# Altium PCB BEE-DAL_EXP.PcbDoc (part 4 of 5)
Units mm, origin at the board's own origin, x right, y up, seen from the top; angles counter-clockwise.
Board outline 93 x 90 mm, 6 copper layers (L1 TOP, L2 GND, L3 SIGNAL, L4 PWR, L5 GND, L6 BOT), stack 1.516 mm thick; 548 components, 447 nets, 1827 pads, 1142 vias.
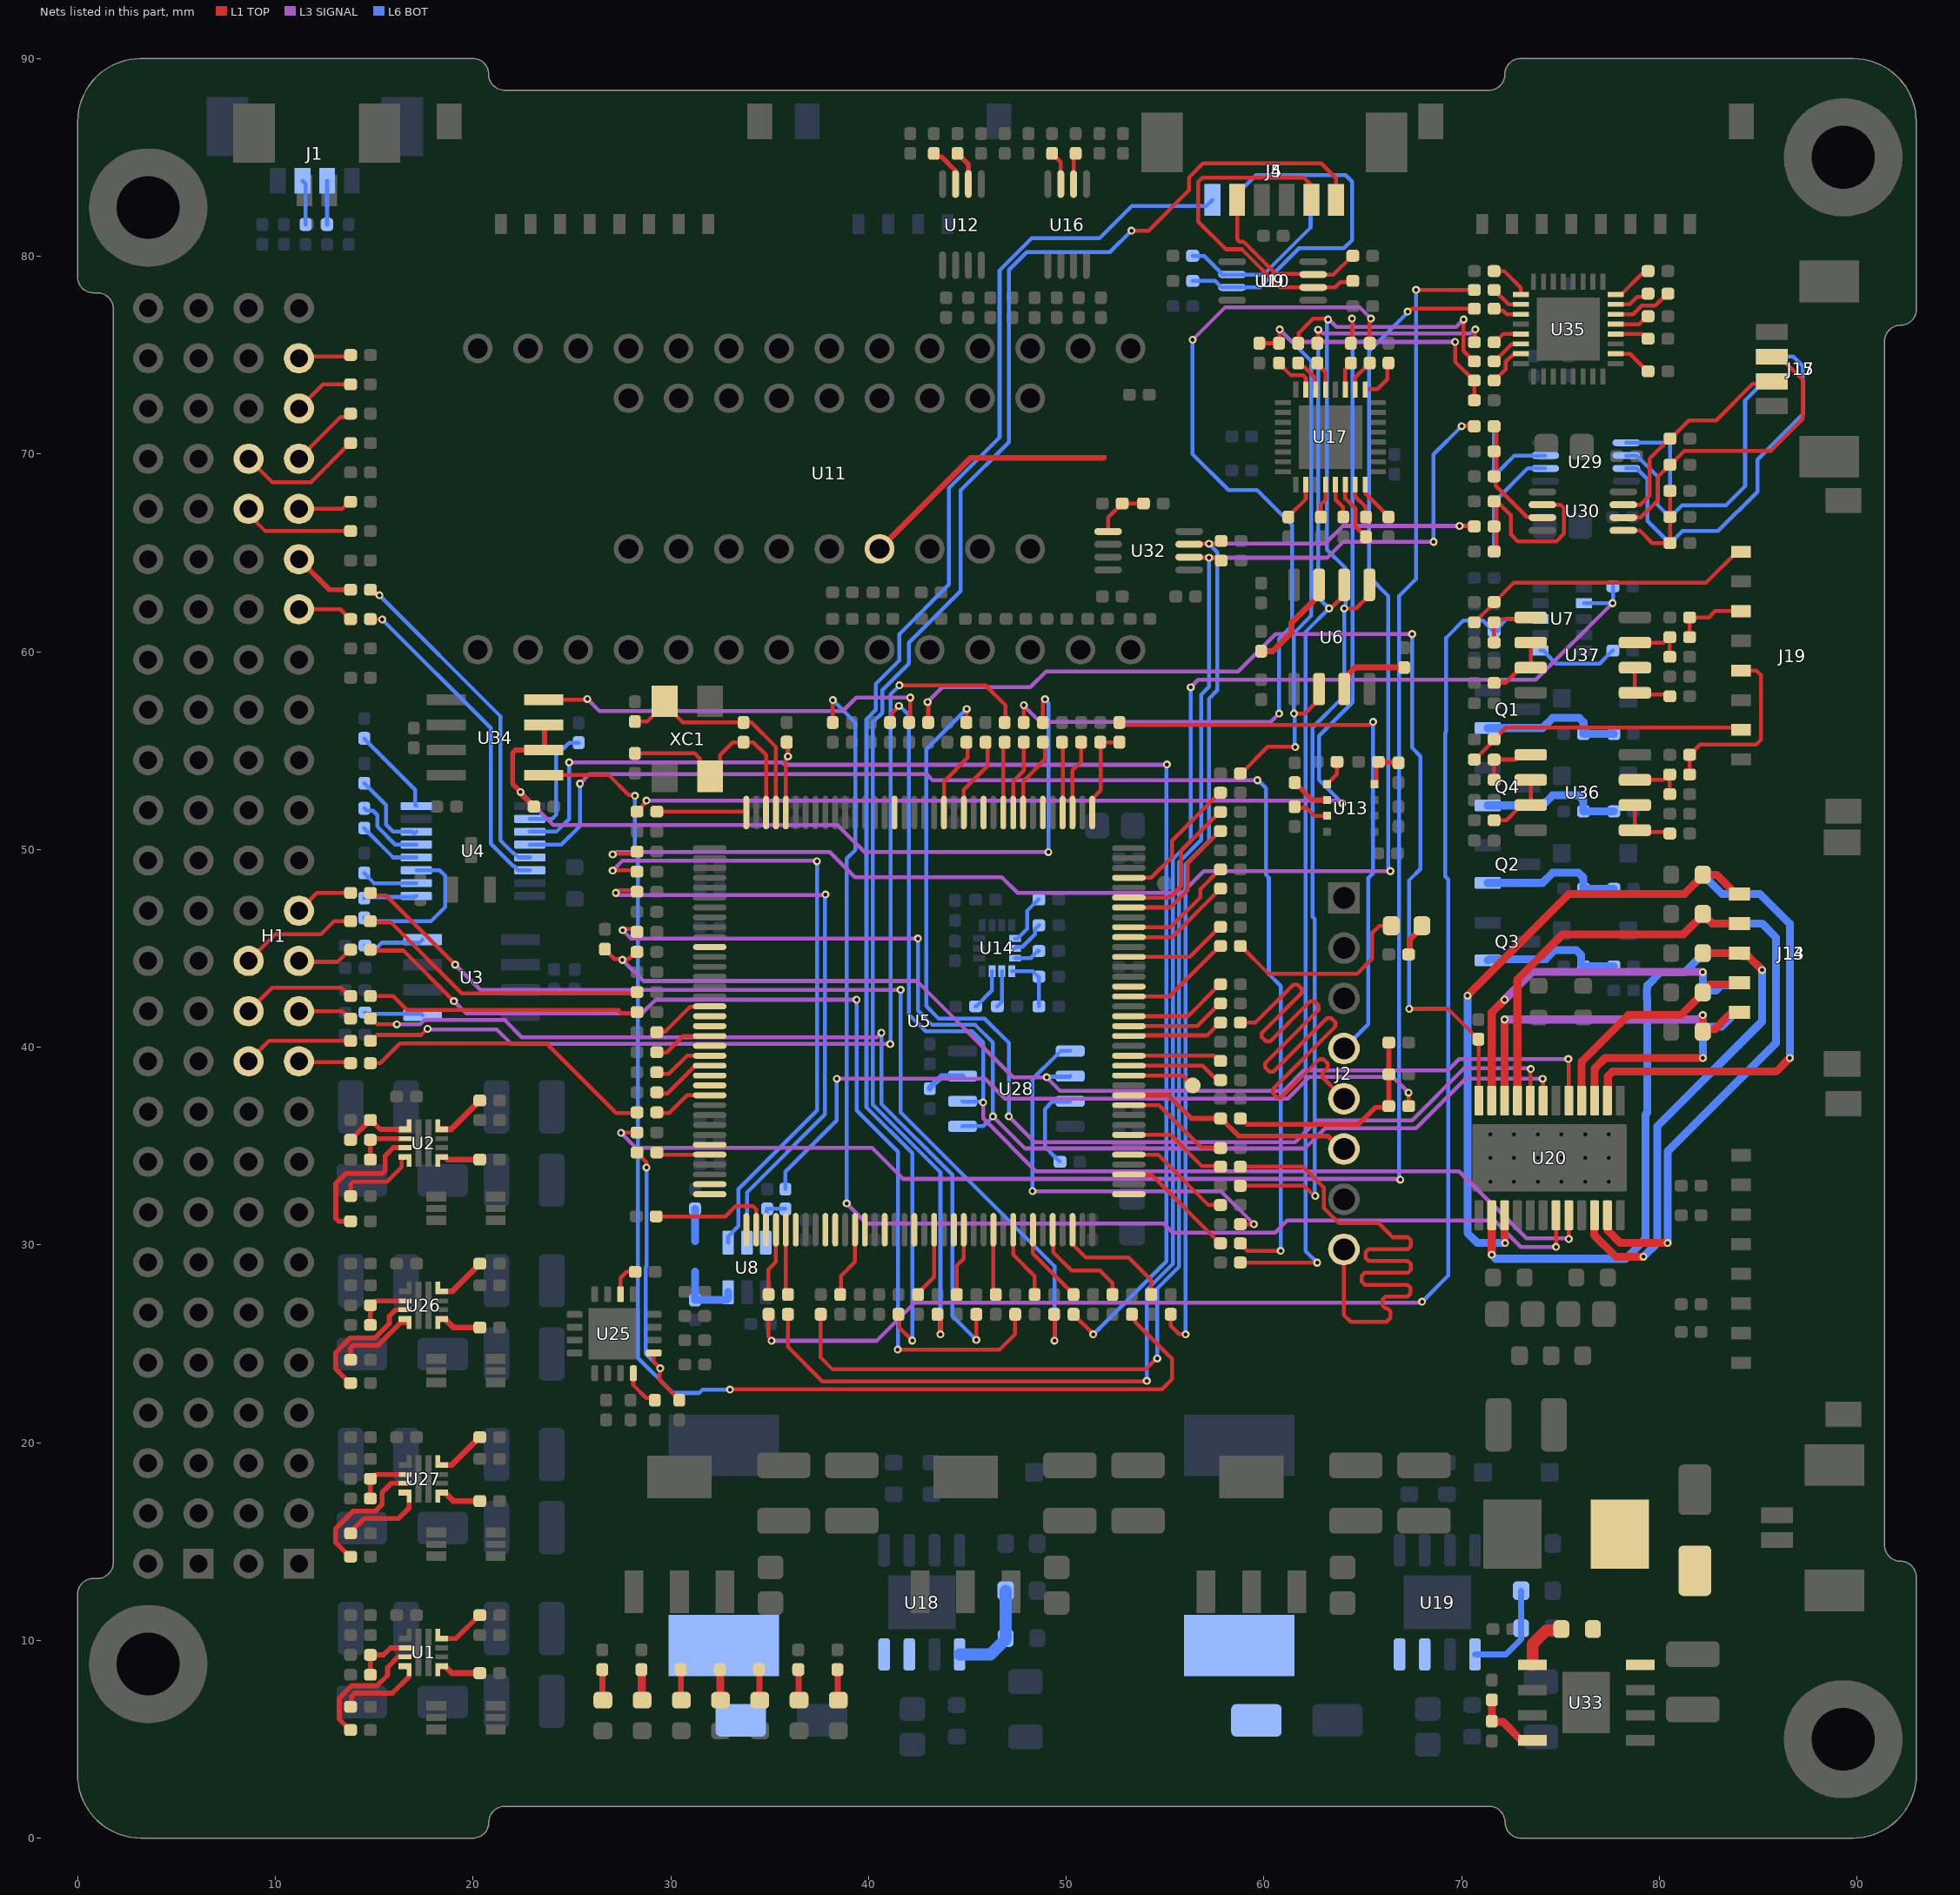
[diagram p8: the nets of this part, all layers, seen from the top]

## Via types
v1: diameter 0.4, hole 0.2, L1 TOP to L6 BOT, tented both sides, 1132 vias
v2: diameter 0.6, hole 0.3, L1 TOP to L6 BOT, tented both sides, 10 vias

## Nets (pads, with @x,y where several pads share a name; then routed paths per layer and width w, separated by ;. In a path a pad name is that pad's centre, name@x,y a point inside that pad or via, vN(x,y) a via of type N, cw(c..) or ccw(c..) an arc to the next point about the centre after c; other vN are vias at no path point) (continued)
MCU_nRESET: J2.6 R81.1 U5.83 | length 12
  L1 TOP w0.25: U5.83@53.172,37.564 55.167,37.564 56.338,36.394 57.833,36.394 58.727,35.5 63.245,35.5 63.895,34.85 J2.6@64.05,34.85
MCU_OSCIN: C25.2 R112.2 U5.141 XC1.3 | length 11.6
  L1 TOP w0.2: C25.2@28.19,56.465 28.81,56.465 29.529,57.184 29.851,57.184 30.615,56.42 34.084,56.42 35.322,55.182 U5.141@35.322,51.864
MCU_OSCOUT: C26.2 R112.1 U5.142 XC1.1 | length 11.6
  L1 TOP w0.2: C26.2@28.19,54.855 31.214,54.855 31.49,54.579 31.49,54.195 XC1.1@31.99,53.695 ; XC1.1@32.045,53.64 32.49,54.085 32.49,54.77 33.14,55.42 34.172,55.42 34.822,54.77 U5.142@34.822,51.864
MCU_PC104_I2C2_SCL: R74.1 R289.1 R316.1 R330.1 U32.3 | length 58.8
  L1 TOP w0.2: R74.1@55.291,26.49 55.291,25.917 55.711,25.496 56.019,25.496 v1(56.041,25.475) ; U32.3@56.223,65.432 56.251,65.46 v1(57.224,65.46) 57.701,65.46 R330.1@57.842,65.602 ; v1(69.9,66.359) 69.912,66.347 70.758,66.347 R316.1@70.77,66.335
  L3 SIGNAL w0.2: v1(57.224,65.46) 63.106,65.46 64.004,66.359 v1(69.9,66.359)
  L6 BOT w0.2: v1(56.041,25.475) 56.041,49.236 57.224,50.419 57.224,57.624 57.649,58.049 57.649,65.035 v1(57.224,65.46) ; v1(69.9,66.359) 69.912,66.347 70.759,66.347 R289.1@70.77,66.335
MCU_PC104_I2C2_SDA: R72.1 R302.1 R317.1 R329.1 U32.2 | length 82.6
  L1 TOP w0.2: R72.1@37.588,26.49 37.588,24.296 38.184,23.7 54.02,23.7 54.573,24.253 v1(54.607,24.253) ; U32.2@56.223,64.782 56.251,64.753 v1(57.224,64.753) 57.696,64.753 R329.1@57.842,64.607 ; v1(70,71.4) R317.1@70.77,71.4
  L3 SIGNAL w0.2: v1(57.224,64.753) 63.211,64.753 64.013,65.555 v1(68.584,65.555)
  L6 BOT w0.2: v1@54.607,24.254 54.607,27.793 55.716,28.901 55.716,49.37 56.825,50.48 56.825,57.824 57.224,58.223 v1(57.224,64.753) ; v1(68.584,65.555) 68.584,69.984 v1(70,71.4) R302.1@70.77,71.4
MCU_PC104_SPI0_CS1: R233.1 R326.1 | length 15.3
  L1 TOP w0.2: R233.1@14.805,39.186 14.81,39.192 15.313,39.192 16.304,40.183 23.722,40.183 27.24,36.664 R326.1@28.27,36.664
MCU_PC104_SPI0_CS2: R311.1 R325.2 | length 51.7
  L1 TOP w0.2: R311.1@14.805,40.318 14.847,40.318 15.147,40.618 17.371,40.618 17.678,40.925 v1(17.7,40.925) ; v1(41.57,58.3) 45.923,58.3 46.928,57.295 R325.2@46.928,56.556
  L3 SIGNAL w0.2: v1(17.7,40.925) 17.725,40.9 21.2,40.9 21.925,40.175 41.081,40.175 v1(41.1,40.156)
  L6 BOT w0.2: v1(41.1,40.156) 41.115,40.171 41.115,57.845 v1(41.57,58.3)
MCU_PC104_SPI0_IRQ1: R307.2 R309.2 | length 13.8
  L1 TOP w0.2: R307.2@14.891,42.583 15.95,42.583 16.658,41.875 27.343,41.875 27.504,41.714 R309.2@28.295,41.714
MCU_PC104_SPI0_IRQ2: R310.2 R312.2 | length 15
  L1 TOP w0.2: R312.2@14.805,46.37 14.861,46.314 15.836,46.314 19.425,42.725 R310.2@28.295,42.725
MCU_PC104_SPI0_MISO: R109.1 R236.1 | length 51.2
  L1 TOP w0.2: R236.1@14.805,47.806 14.938,47.674 15.594,47.674 v1(19.098,44.169) ; v1(49.41,25.153) R109.1@49.41,26.49
  L3 SIGNAL w0.2: v1(19.098,44.169) 20.367,42.9 v1(41.625,42.9)
  L6 BOT w0.2: v1(41.625,42.9) 41.625,36.7 49.41,28.915 v1(49.41,25.153)
MCU_PC104_SPI0_MOSI: R235.1 R323.1 | length 52.1
  L1 TOP w0.2: R235.1@14.805,44.933 14.853,44.885 16.473,44.885 v1(19.032,42.327) ; v1(41.481,24.704) 46.632,24.704 47.423,25.495 R323.1@47.423,26.49
  L3 SIGNAL w0.2: v1(19.032,42.327) 19.659,41.7 28.534,41.7 29.234,42.4 v1(39.4,42.4)
  L6 BOT w0.2: v1(39.4,42.4) 39.4,36.8 41.489,34.711 41.489,24.712 v1(41.481,24.704)
MCU_PC104_SPI0_SCK: R234.1 R324.2 | length 45.3
  L1 TOP w0.2: R234.1@14.805,41.45 14.847,41.45 15.147,41.15 v1(16.14,41.15) ; v1(45.456,25.196) R324.2@45.456,26.433
  L3 SIGNAL w0.2: v1(16.14,41.15) 17.324,41.15 17.549,41.375 21.592,41.375 22.467,40.5 40.422,40.5 v1(40.65,40.728)
  L6 BOT w0.2: v1(40.65,40.728) 40.65,37.131 44.244,33.537 44.244,26.408 v1(45.456,25.196)
MCU_PRAM_SPI1_nCS: R308.2 U28.1 | length 20.7
  L1 TOP w0.2: R308.2@58.808,31.048 v1(59.5,31.048)
  L3 SIGNAL w0.2: v1(48.3,32.718) 48.318,32.7 57.848,32.7 v1(59.5,31.048)
  L6 BOT w0.2: v1(48.3,32.718) 48.3,38.381 49.545,39.626 49.552,39.626 49.731,39.805 U28.1@50.204,39.805
MCU_RS232_RX_OBC_TX: R242.1 U4.13 | length 17.4
  L1 TOP w0.2: R242.1@14.805,63.133 14.857,63.133 15.095,62.895 15.225,62.895 v1(15.263,62.856)
  L6 BOT w0.2: v1(15.263,62.856) 21.377,56.743 21.377,50.46 22.022,49.814 22.071,49.814 22.291,49.594 U4.13@22.871,49.594
MCU_RS232_TX_OBC_RX: R241.1 U4.14 | length 16.8
  L1 TOP w0.2: R241.1@14.805,61.648 14.814,61.639 15.395,61.639 v1(15.404,61.63)
  L6 BOT w0.2: v1(15.404,61.63) 20.9,56.134 20.9,50.287 22.022,49.164 22.071,49.164 22.291,48.944 U4.14@22.871,48.944
MCU_RS485_R\E\_DE: R275.2 R313.2 U34.2 U34.3 | length 43
  L1 TOP w0.2: R313.2@48.824,56.513 48.824,57.453 48.93,57.559 v1(48.93,57.6)
  L1 TOP w0.25: R275.2@23.106,52.17 23.056,52.17 22.429,52.797 22.429,52.871 v1(22.4,52.9) 22.4,52.913 22,53.313 22,54.879 22.146,55.025 23.615,55.025 U34.3@23.615,56.295
  L3 SIGNAL w0.2: v1(22.4,52.9) 24.075,51.225 38.443,51.225 39.803,49.865 v1(49.1,49.865)
  L6 BOT w0.2: v1(48.93,57.6) 48.93,57.559 49.1,57.389 v1(49.1,49.865)
MCU_RTC_CLKOUT: R86.2 R117.1 U7.3 | length 74.8
  L1 TOP w0.2: R86.2@34.948,26.49 34.948,25.356 35.098,25.206 v1(35.098,25.151)
  L3 SIGNAL w0.2: v1(35.098,25.151) 40.42,25.151 42.343,27.075 67.809,27.075 67.82,27.087 67.962,27.087 v1(68,27.125)
  L6 BOT w0.2: v1(68,27.125) 69.325,28.45 69.325,48.483 69.175,48.633 69.175,55.89 69.225,55.94 69.225,60.707 70.085,61.567 71.093,61.567 71.618,61.042 R117.1@71.643,61.042 ; R117.1@71.826,61.042 71.851,61.067 71.851,61.225 72.28,61.653 U7.3@73.994,61.653
MCU_RTC_INT: R87.2 R118.1 U7.7 | length 81.9
  L1 TOP w0.2: R87.2@35.928,26.49 35.928,24.842 37.67,23.1 54.055,23.1 v1(54.08,23.125)
  L3 SIGNAL w0.2: v1(56.3,58.2) 56.675,58.575 73.755,58.575 v1(77.633,62.453)
  L6 BOT w0.2: v1(54.08,23.125) 54.08,27.726 55.391,29.036 55.391,49.505 56.3,50.414 v1(56.3,58.2) ; U7.7@76.194,62.453 v1(77.633,62.453) 77.658,62.478 R118.1@77.658,63.303
MCU_SENSOR1_nIRQ: J4.1 R64.1 | length 79.8
  L1 TOP w0.2: R64.1@43.44,26.49 43.64,26.29 v1(43.64,25.475) ; v1(53.3,81.292) 54.165,81.292 56.223,83.35 56.223,84 56.923,84.7 62.9,84.7 63.65,83.95 J4.1@63.65,82.85
  L6 BOT w0.2: v1(43.64,25.475) 43.64,33.681 40.225,37.096 40.225,56.439 40.7,56.914 40.7,58.047 42.05,59.397 42.05,60.45 44.665,63.065 44.665,68.165 47.1,70.6 47.1,79.301 48.004,80.205 52.214,80.205 v1(53.3,81.292)
MCU_SENSOR2_nIRQ: J5.1 R66.1 | length 71.7
  L1 TOP w0.2: R66.1@41.489,26.483 41.564,26.407 41.564,25.811 v1(42.216,25.16)
  L6 BOT w0.2: v1(42.216,25.16) 42.216,34.646 39.9,36.962 39.9,56.589 40.375,57.064 40.375,58.373 41.57,59.568 41.57,60.899 44.075,63.404 44.075,68.275 46.631,70.831 46.631,79.292 48.244,80.905 51.688,80.905 53.333,82.55 57.1,82.55 J5.1@57.4,82.85
MCU_SPI0_CMD_SOLE_A: R105.2 R171.1 | length 47.6
  L1 TOP w0.2: R105.2@47.857,56.449 v1(47.857,57.295) ; R171.1@65.354,75.6 65.354,76.644 65.38,76.67 65.38,76.812 v1(65.418,76.85)
  L3 SIGNAL w0.2: v1(47.857,57.295) 47.857,57.273 48.68,56.45 60.345,56.45 v1(60.77,56.875) ; v1(56.399,75.775) 58.049,77.425 64.843,77.425 v1(65.418,76.85)
  L6 BOT w0.2: v1(56.399,75.775) 56.399,69.985 58.209,68.175 59.654,68.175 61.425,66.404 61.425,61.31 60.77,60.655 v1(60.77,56.875)
MCU_SPI0_CMD_SOLE_B: R76.1 R416.1 | length 89.5
  L1 TOP w0.2: v1(27.483,35.668) 27.487,35.672 R76.1@28.27,35.672 ; v1(67.7,78.301) R416.1@70.643,78.3 R416.1@70.643,78.3
  L3 SIGNAL w0.2: v1(27.483,35.668) 28.252,34.9 40.2,34.9 41.765,33.335 66.865,33.335 v1(66.9,33.3)
  L6 BOT w0.2: v1(66.9,33.3) 66.862,33.338 66.862,33.48 66.85,33.491 66.85,62.824 67.7,63.674 v1(67.7,78.301)
MCU_SPI0_nCS_SOLE_A: R104.1 R167.1 | length 63
  L1 TOP w0.2: R104.1@28.27,51.92 28.27,51.922 28.77,52.422 v1(28.77,52.47) ; R167.1@64.404,75.6 64.462,75.658 64.462,76.849 v1(64.461,76.85)
  L3 SIGNAL w0.2: v1(28.77,52.47) 63.775,52.47 63.921,52.324 v1(63.975,52.324)
  L6 BOT w0.2: v1(63.975,52.324) 62.786,53.513 62.786,55.736 64.485,57.435 64.485,76.826 v1(64.461,76.85)
MCU_SPI0_nCS_SOLE_B: R75.1 R412.1 | length 75
  L1 TOP w0.2: v1(27.062,49.748) 27.1,49.786 28.123,49.786 R75.1@28.27,49.934 ; v1(67.275,77.2) 67.329,77.2 67.479,77.35 R412.1@70.643,77.35
  L3 SIGNAL w0.2: v1(27.062,49.748) 27.116,49.748 27.243,49.875 38.044,49.875 39.319,48.6 46.74,48.6 47.54,47.8 55.854,47.8 56.954,48.9 v1(66.4,48.9)
  L6 BOT w0.2: v1(66.4,48.9) 66.4,48.954 66.3,49.054 66.3,62.813 65.318,63.794 65.318,75.205 67.275,77.162 v1(67.275,77.2)
MCU_SPI1_MISO: R108.2 R110.2 U20.5 U28.2 | length 56.6
  L1 TOP w0.2: R108.2@26.671,44.958 26.671,44.933 27.152,44.453 27.512,44.453 v1(27.55,44.414) 27.589,44.453 27.878,44.453 28.243,44.817 R110.2@28.295,44.817 ; v1(75.4,39.4) 75.413,39.387 75.413,37.313 U20.5@75.426,37.3
  L3 SIGNAL w0.2: v1(27.55,44.414) 28.619,43.346 42.454,43.346 47.324,38.476 v1(49.011,38.476) 49.687,37.8 61,37.8 62.025,38.825 69.3,38.825 69.875,39.4 v1(75.4,39.4)
  L6 BOT w0.2: v1(49.011,38.476) 49.041,38.505 50.174,38.505 U28.2@50.204,38.535
MCU_SPI1_MOSI: R111.2 U20.7 U28.5 | length 60.5
  L1 TOP w0.2: v1(27.569,45.914) 27.626,45.972 R111.2@28.27,45.972 ; v1(74.1,38.4) 74.113,38.387 74.113,37.313 U20.7@74.126,37.3
  L3 SIGNAL w0.2: v1(27.569,45.914) 27.576,45.914 27.99,45.5 v1(42.5,45.5) ; v1(46.3,36.5) 47.925,34.875 62.075,34.875 63.1,35.9 67.7,35.9 70.2,38.4 v1(74.1,38.4)
  L6 BOT w0.2: v1(42.5,45.5) 42.5,41.846 43.221,41.125 45.401,41.125 46.3,40.226 v1(46.3,36.5) 45.803,36.003 44.764,36.003 U28.5@44.756,35.995
MCU_SPI1_SCK: R107.2 U20.20 U28.6 | length 59.5
  L1 TOP w0.2: R107.2@41.09,56.42 41.179,56.509 41.179,56.892 v1(41.54,57.254) ; v1(75.426,30.3) U20.20@75.426,31.5
  L3 SIGNAL w0.2: v1(45.8,37.2) 45.8,36.399 48.474,33.725 69.883,33.725 73.283,30.325 75.401,30.325 v1(75.426,30.3)
  L6 BOT w0.2: v1(41.54,57.254) 41.595,57.254 42.05,56.798 42.05,41.65 42.9,40.8 45.231,40.8 45.8,40.231 v1(45.8,37.2) 45.767,37.233 44.788,37.233 U28.6@44.756,37.265
MCU_STATUS_LED_1: D3.2 R31.1 | length 10
  L1 TOP w0.2: R31.1@58.808,45.116 58.833,45.116 60.249,43.7 64.7,43.7 65.478,44.478 65.478,45.771 65.837,46.131 66.436,46.131 D3.2@66.445,46.14
MCU_STEP_FAULT: R77.2 R180.1 U20.12 | length 53.6
  L1 TOP w0.2: v1(42.989,57.456) 43.023,57.421 R77.2@43.023,56.42 ; v1(67.356,41.938) 69.313,41.938 70.876,40.375 U20.12@70.876,37.3
  L3 SIGNAL w0.2: v1(42.989,57.456) 43.733,58.2 48.185,58.2 48.985,59 58.7,59 60.592,60.892 v1(67.5,60.892)
  L6 BOT w0.2: v1(67.356,41.938) 67.356,48.449 67.925,49.018 67.925,54.716 67.5,55.141 v1(67.5,60.892)
MCU_STEP_SLEEP: R30.2 U20.8 | length 55.3
  L1 TOP w0.2: R30.2@44.972,56.47 44.964,56.477 44.964,57.097 v1(44.972,57.105) ; U20.8@73.476,37.3 73.488,37.312 73.488,38.888 v1(73.5,38.9)
  L3 SIGNAL w0.2: v1(47.1,36.5) 48.4,35.2 61.575,35.2 62.675,36.3 67.5,36.3 70.125,38.925 73.475,38.925 v1(73.5,38.9)
  L6 BOT w0.2: v1(44.972,57.105) 42.925,55.058 42.925,42.075 43.55,41.45 45.869,41.45 47.1,40.219 v1(47.1,36.5)
MCU_STEP_SPI1_nCS: R179.2 U20.19 | length 66.1
  L1 TOP w0.2: R179.2@38.19,56.42 38.19,57.537 v1(38.204,57.551) ; v1(74.776,29.9) U20.19@74.776,31.5
  L3 SIGNAL w0.2: v1(38.9,32.1) 39.916,31.084 54.935,31.084 55.396,30.623 60.563,30.623 61.165,31.225 71.676,31.225 73.001,29.9 v1(74.776,29.9)
  L6 BOT w0.2: v1(38.204,57.551) 39.347,56.409 39.347,49.985 38.9,49.538 v1(38.9,32.1)
MCU_SWDIO: J2.8 R96.1 | length 30.9
  L1 TOP w0.2: R96.1@58.808,33.955 61.97,33.955 63.025,32.9 63.025,31.867 63.792,31.1 65.8,31.1 66.263,30.637 66.513,30.387 67.284,30.387 67.434,30.237 67.434,29.937 67.284,29.787 65.3,29.787 65.15,29.637 65.15,29.337 65.3,29.187 67.284,29.187 67.434,29.037 67.434,28.737 67.284,28.587 65.106,28.587 64.956,28.437 64.956,28.137 65.106,27.987 67.262,27.987 67.412,27.837 67.412,27.537 67.262,27.387 66.149,27.387 65.999,27.237 65.999,26.937 66.149,26.787 66.25,26.787 66.4,26.637 66.4,26.3 66.275,26.175 66.2,26.1 64.4,26.1 64.05,26.45 J2.8@64.05,29.77
MCU_TRACESWO: J2.4 R94.1 | length 29.9
  L1 TOP w0.2: R94.1@52.691,56.42 52.811,56.3 65.321,56.3 65.471,56.45 v1(65.525,56.45)
  L6 BOT w0.2: J2.4@64.2,40 64.2,40.08 65.275,41.155 65.275,48.543 65.525,48.793 v1(65.525,56.45)
MCU_TST: TP1.1 U5.85 | length 3.4
  L1 TOP w0.2: U5.85@53.172,38.564 55.9,38.564 TP1.1@56.4,38.064
MCU_TSWCLK: J2.5 R99.1 | length 31.2
  L1 TOP w0.2: R99.1@58.808,41.24 59.428,41.24 59.569,41.24 61.495,43.165 61.707,43.165 61.919,42.953 61.919,42.741 59.898,40.72 59.898,40.507 60.11,40.295 60.322,40.295 62.343,42.317 62.556,42.317 62.768,42.104 62.768,41.892 60.061,39.186 60.061,38.974 60.273,38.762 60.485,38.762 63.192,41.468 63.404,41.468 63.616,41.256 63.616,41.044 60.457,37.885 60.457,37.673 60.669,37.461 60.881,37.461 62.806,39.385 63.018,39.385 63.23,39.173 63.23,38.961 62.961,38.691 62.961,38.479 63.26,38.18 63.331,38.109 J2.5@64.05,37.39
MCU_UART0_RX_OBC_TX: R46.2 U4.12 | length 66.2
  L1 TOP w0.2: R46.2@58.808,30.078 59.186,29.7 v1(60.85,29.7)
  L3 SIGNAL w0.2: v1(25.406,53.325) 25.881,53.8 42.945,53.8 43.245,53.5 v1(59.675,53.5)
  L6 BOT w0.2: U4.12@22.871,50.244 24.47,50.244 25.406,51.18 v1(25.406,53.325) ; v1(59.675,53.5) 59.709,53.5 60.1,53.109 60.1,48.718 60.25,48.568 60.25,43.695 60.85,43.095 v1(60.85,29.7)
MCU_UART0_TX_OBC_RX: R48.2 U4.11 | length 67.1
  L1 TOP w0.2: R48.2@50.39,26.465 51.37,25.485 v1(51.37,25.475)
  L3 SIGNAL w0.2: v1(24.86,54.4) 35.633,54.4 35.752,54.282 55.082,54.282 v1(55.1,54.3)
  L6 BOT w0.2: U4.11@22.871,50.894 24.21,50.894 24.86,51.544 v1(24.86,54.4) ; v1(51.37,25.475) 55.066,29.17 55.066,54.208 v1@55.1,54.208
MCU_UART4_RX: R57.1 U34.1 | length 65.7
  L1 TOP w0.2: U34.1@23.615,53.755 26.873,53.755 27.873,52.755 28.154,52.755 v1(28.192,52.716) ; v1(33,22.685) 33.015,22.7 54.844,22.7 55.361,23.217 55.361,24.239 53.493,26.107 53.493,26.321 R57.1@53.324,26.49
  L6 BOT w0.2: v1(28.192,52.716) 28.192,50.124 28.345,49.971 28.345,24.284 30.119,22.51 31.445,22.51 31.62,22.685 v1(33,22.685)
MCU_UART4_TX: R34.1 U34.4 | length 20.4
  L1 TOP w0.2: U34.4@23.584,57.565 25.685,57.565 25.729,57.609 v1(25.783,57.609) ; R34.1@42.057,56.42 42.115,56.479 v1(42.115,57.679)
  L3 SIGNAL w0.2: v1(25.783,57.609) 26.392,57 38.7,57 39.379,57.679 v1(42.115,57.679)
MCU_USART_RXD2: R54.1 R165.2 R166.1 R410.2 R411.1 U6.2 | length 41.8
  L1 TOP w0.2: R54.1@58.808,53.839 58.846,53.839 60.2,55.193 61.574,55.193 v1(61.592,55.175) ; R165.2@59.77,75.6 60.1,75.6 R166.1@60.77,75.6 60.785,75.615 60.785,76.285 v1(60.8,76.3) ; v1(61.525,56.875) 62.084,56.875 62.796,57.587 U6.2@62.796,58.112 ; v1(69.668,75.665) 69.668,74.666 70.618,73.716 R411.1@70.643,73.716 R410.2@70.643,72.716
  L3 SIGNAL w0.2: v1(60.8,76.3) 61.435,75.665 v1(69.668,75.665)
  L6 BOT w0.2: v1(60.8,76.3) 62.4,74.7 62.4,61.825 61.525,60.95 v1(61.525,56.875) 61.558,56.842 61.558,55.208 v1(61.592,55.175)
MCU_USART_SCK2: R56.1 R168.1 R413.1 U6.6 | length 63.1
  L1 TOP w0.2: R56.1@58.808,29.109 58.813,29.105 62.695,29.105 v1(62.7,29.1) ; R168.1@62.704,75.6 62.726,75.622 62.726,76.263 v1(62.747,76.285) ; v1(63.299,62.19) 63.337,62.228 63.437,62.228 64.066,62.857 U6.6@64.066,63.382 ; R413.1@70.643,75.65 70.672,75.678 70.672,76.272 v1(70.7,76.3)
  L3 SIGNAL w0.2: v1(62.747,76.285) 62.801,76.285 62.986,76.1 70.446,76.1 70.646,76.3 v1(70.7,76.3)
  L6 BOT w0.2: v1(62.7,29.1) 62.1,29.7 62.1,60.991 v1(63.299,62.19) 62.747,62.742 v1(62.747,76.285)
MCU_USART_TXD2: R55.1 R169.1 R414.1 U6.5 | length 63.3
  L1 TOP w0.2: R55.1@58.808,32.986 62.038,32.986 62.546,32.478 v1(62.6,32.478) ; R169.1@61.737,75.6 61.755,75.618 61.755,76.108 62.486,76.838 63.209,76.838 v1(63.247,76.8) ; v1(64.06,62.184) 64.662,62.184 65.336,62.857 U6.5@65.336,63.382 ; v1(70.1,76.8) 70.093,76.793 70.093,75.208 70.618,74.683 R414.1@70.643,74.683
  L3 SIGNAL w0.2: v1(63.247,76.8) 63.301,76.8 63.676,76.425 69.725,76.425 v1(70.1,76.8)
  L6 BOT w0.2: v1(62.6,32.478) 62.575,32.503 62.575,46.487 62.461,46.601 62.461,56.157 64.06,57.755 v1(64.06,62.184) ; v1(63.247,76.8) 63.247,76.746 63.195,76.694 63.195,65.167 64.139,64.223 v1@64.139,62.263
MCU_WD_DONE: R83.1 U8.4 | length 32.9
  L1 TOP w0.2: v1(27.062,48.931) 27.067,48.936 28.265,48.936 R83.1@28.27,48.941
  L3 SIGNAL w0.2: v1(27.062,48.931) 27.554,49.423 37.377,49.423 v1(37.4,49.4)
  L6 BOT w0.2: U8.4@32.903,30.116 32.903,30.426 33.425,30.949 33.425,32.825 37.4,36.8 v1(37.4,49.4)
MCU_WD_nRESET: R80.2 R123.1 | length 37.6
  L1 TOP w0.2: R80.2@67.32,37.02 67.32,36.96 v1(67.32,37.7)
  L3 SIGNAL w0.2: v1(38.4,38.4) 45.9,38.4 46.9,37.4 61.2,37.4 62.3,38.5 66.52,38.5 v1(67.32,37.7)
  L6 BOT w0.2: R123.1@35.8,32.819 35.8,33.7 38.4,36.3 v1(38.4,38.4)
MCU_WD_WAKE: R85.1 U8.5 | length 31
  L1 TOP w0.2: v1(27.225,47.8) 27.254,47.8 27.392,47.938 R85.1@28.257,47.938
  L3 SIGNAL w0.2: v1(27.225,47.8) 27.254,47.8 27.357,47.697 37.802,47.697 v1(37.825,47.72)
  L6 BOT w0.2: U8.5@33.853,30.116 33.853,32.654 37.8,36.601 37.8,47.695 v1(37.825,47.72)
MOTOR_1_OUT_1: C88.2 J13.1 U20.2 | length 23
  L1 TOP w0.4: U20.2@77.376,37.3 77.401,37.325 77.401,38.53 77.635,38.764 85.912,38.764 v1(86.6,39.452)
  L6 BOT w0.4: C88.2@82.2,48.721 83.17,47.752 J13.1@84.058,47.752 85.086,47.752 86.6,46.238 v1(86.6,39.452)
MOTOR_1_OUT_2: C87.2 J13.2 U20.23 | length 26
  L1 TOP w0.4: U20.23@77.376,31.5 77.401,31.475 77.401,30.723 78.024,30.1 v1(80.425,30.1)
  L6 BOT w0.4: v1(80.425,30.1) 80.425,34.725 85.9,40.2 85.9,45.552 85.2,46.252 J13.2@84.058,46.252 82.686,46.252 82.469,46.468 82.446,46.468 C87.2@82.2,46.715
MOTOR_1_OUT_3: C86.2 J13.3 U20.14 | length 28.5
  L1 TOP w0.4: v1(71.526,29.5) U20.14@71.526,31.5
  L6 BOT w0.4: v1(71.526,29.5) 71.726,29.3 78.3,29.3 79.3,30.3 79.3,36.6 79.396,36.696 79.396,42.462 79.375,42.483 79.375,42.917 79.396,42.938 79.396,43.117 80.069,43.791 81.287,43.791 82.2,44.704 C86.2@82.2,44.754 ; C86.2@82.201,44.753 J13.3@84.057,44.753
MOTOR_1_OUT_4: C85.2 J13.4 U20.11 | length 19.1
  L1 TOP w0.4: U20.11@71.526,37.3 71.526,41.75 v1(72.176,42.4)
  L3 SIGNAL w0.4: v1(72.176,42.4) 73.576,43.8 82.191,43.8 v1(82.2,43.791)
  L6 BOT w0.4: v1(82.2,43.791) C85.2@82.2,42.77 82.298,42.77 82.4,42.871 82.88,42.871 83.145,43.137 83.943,43.137 J13.4@84.058,43.252
MOTOR_1_OUT_5: C84.2 J13.5 U20.3 | length 10.9
  L1 TOP w0.4: U20.3@76.726,37.3 76.726,37.7 76.726,38.2 76.726,38.919 77.259,39.452 v1(82.201,39.452)
  L6 BOT w0.4: v1@82.2,39.453 82.2,40.836 82.4,41.036 83.151,41.036 83.867,41.752 J13.5@84.058,41.752
MOTOR_2_OUT_1: C93.2 J14.1 U20.10 | length 17.3
  L1 TOP w0.4: U20.10@72.176,37.348 v1(72.176,41.4) ; v1@82.2,41.621 C93.2@82.2,40.786 82.319,40.904 82.804,40.904 83.522,41.622 83.928,41.622 J14.1@84.058,41.752
  L3 SIGNAL w0.4: v1(72.176,41.4) 81.979,41.4 v1(82.201,41.622)
MOTOR_2_OUT_2: C92.2 J14.2 U20.4 | length 11.6
  L1 TOP w0.4: U20.4@76.076,37.3 76.076,37.7 76.076,38.2 76.076,39.266 78.43,41.621 81.101,41.621 82.2,42.72 82.2,42.793 82.568,43.161 83.967,43.161 J14.2@84.058,43.252
MOTOR_2_OUT_3: C91.2 J14.3 U20.22 | length 24.2
  L1 TOP w0.4: U20.22@76.726,31.5 76.709,31.483 76.709,30.492 77.801,29.4 v1(79.2,29.4) ; C91.2@82.4,44.884 82.4,44.798 82.446,44.752 J14.3@84.058,44.752 84.238,44.572 84.528,44.572 v1@85.181,43.919
  L6 BOT w0.4: v1(79.2,29.4) 79.9,30.1 79.9,36 85.2,41.3 v1(85.2,43.9)
MOTOR_2_OUT_4: C90.2 J14.4 U20.9 | length 19
  L1 TOP w0.4: U20.9@72.826,37.3 72.826,37.8 72.826,43.424 75.102,45.7 81.212,45.7 C90.2@82.2,46.688 ; J14.4@84.058,46.252 82.686,46.252 82.45,46.488 82.4,46.488 C90.2@82.2,46.688 ; C90.2@82.2,46.688 C90.2@82.2,46.738 C90.2@82.2,46.688
MOTOR_2_OUT_5: C89.2 J14.5 U20.15 | length 32.1
  L1 TOP w0.4: v1(70.3,42.6) 75.452,47.752 81.28,47.752 82.2,48.671 C89.2@82.2,48.721 82.898,48.721 J14.5@83.867,47.752 ; U20.15@72.176,31.5 72.176,30.124 v1(72.2,30.1)
  L6 BOT w0.4: v1(70.3,42.6) 70.3,30.601 70.801,30.1 v1(72.2,30.1)
NetC5_2: C5.2 U1.10 | length 2.4
  L1 TOP w0.25: U1.10@18.412,10.091 19.137,10.091 20.318,11.273 C5.2@20.343,11.273
NetC6_2: C6.2 U1.7 | length 2.1
  L1 TOP w0.3: U1.7@18.412,8.691 18.587,8.691 18.937,8.341 C6.2@20.343,8.341
NetC11_2: C11.2 U2.10 | length 2.5
  L1 TOP w0.3: U2.10@18.412,35.844 18.885,35.844 20.168,37.126 20.168,37.151 20.318,37.301 C11.2@20.343,37.301
NetC12_2: C12.2 U2.7 | length 2
  L1 TOP w0.3: U2.7@18.412,34.444 18.587,34.444 18.713,34.317 C12.2@20.343,34.317
NetC17_1: C17.1 U4.3 | length 7.6
  L6 BOT w0.2: C17.1@14.501,46.541 14.667,46.375 17.875,46.375 18.6,47.1 18.6,48.654 18.31,48.944 U4.3@17.131,48.944
NetC17_2: C17.2 U4.1 | length 2.7
  L6 BOT w0.2: C17.2@14.501,47.541 14.552,47.593 17.079,47.593 U4.1@17.131,47.644
NetC19_1: C19.1 D17.1 L3.1 U33.8
NetC19_2: C19.2 U33.1 | length 2.8
  L1 TOP w0.6: U33.1@73.586,8.753 73.588,8.756 73.588,9.808 74.295,10.515 74.997,10.515 C19.2@75.049,10.567
NetC23_2: C23.2 R78.1 R80.1 R81.2 | length 11.2
  L1 TOP w0.25: R81.2@58.808,36.394 58.846,36.394 59.143,36.097 64.785,36.097 65.649,36.96 66.26,36.96 R80.1@66.32,37.02 66.32,39.175 R78.1@66.32,40.23
NetC24_2: C24.2 R113.2 U5.140 | length 4.4
  L1 TOP w0.2: U5.140@35.822,51.864 35.822,54.546 35.928,54.652 v1(35.928,54.707) ; R113.2@35.84,55.4 35.899,55.341 35.899,54.728 v1@35.921,54.707
  L6 BOT w0.2: C24.2@35.87,55.42 35.899,55.391 35.899,54.735 v1(35.928,54.707)
NetC65_1: C65.1 U17.24 | length 2.2
  L1 TOP w0.2: U17.24@65.12,68.45 65.147,68.423 65.147,67.991 66.329,66.809 C65.1@66.385,66.809
NetC66_1: C66.1 U17.22 | length 3.1
  L1 TOP w0.2: U17.22@64.12,68.45 64.12,67.743 64.637,67.226 64.637,66.334 C66.1@65.162,65.809
NetC66_2: C66.2 U17.23 | length 1.8
  L1 TOP w0.2: U17.23@64.62,68.45 64.62,67.851 65.154,67.317 65.154,66.971 C66.2@65.211,66.915
NetC67_2: C67.2 U17.20 | length 1.7
  L1 TOP w0.2: C67.2@62.879,66.809 62.879,67.438 63.12,67.679 U17.20@63.12,68.45
NetC72_2: C72.2 R174.1 U18.5 | length 5.1
  L6 BOT w0.6: U18.5@44.607,9.287 46.168,9.287 C72.2@46.942,10.061 ; C72.2@46.942,10.111 R174.1@46.942,12.511
NetC77_2: C77.2 R177.1 U19.5 | length 5.1
  L6 BOT w0.3: U19.5@70.679,9.288 72.24,9.288 73.014,10.062 ; 73.014,10.112 R177.1@73.014,12.511
NetC126_2: C126.2 U26.10 | length 2.5
  L1 TOP w0.3: U26.10@18.412,27.646 18.939,27.646 20.168,28.876 20.168,28.901 20.318,29.051 C126.2@20.343,29.051
NetC127_2: C127.2 U26.7 | length 2.1
  L1 TOP w0.3: U26.7@18.412,26.246 18.587,26.246 19.012,25.821 C127.2@20.343,25.821
NetC132_2: C132.2 U27.10 | length 2.5
  L1 TOP w0.3: U27.10@18.412,18.867 18.914,18.867 20.318,20.272 C132.2@20.343,20.272
NetC133_2: C133.2 U27.7 | length 2.1
  L1 TOP w0.3: U27.7@18.412,17.467 18.587,17.467 19.012,17.042 C133.2@20.343,17.042
NetC142_1: C142.1 U4.5 | length 3.7
  L6 BOT w0.2: C142.1@14.501,52.08 14.623,51.958 14.939,51.958 15.153,51.744 15.153,51.159 16.067,50.244 U4.5@17.131,50.244
NetC142_2: C142.2 U4.4 | length 3.3
  L6 BOT w0.2: C142.2@14.501,51.08 14.501,51.055 15.961,49.594 U4.4@17.131,49.594
NetC143_2: C143.2 U4.6 | length 4.3
  L6 BOT w0.2: C143.2@14.501,53.35 14.503,53.35 15.6,52.252 15.6,51.256 15.951,50.905 16.91,50.905 17.026,50.789 U4.6@17.131,50.894
NetC144_2: C144.2 U4.2 | length 2.9
  L6 BOT w0.2: C144.2@14.501,48.811 14.501,48.786 14.992,48.294 U4.2@17.131,48.294
NetC171_2: C171.2 R345.2 U36.3 | length 2.9
  L1 TOP w0.2: U36.3@78.77,53.517 80.208,53.517 80.483,53.792 R345.2@80.535,53.792 C171.2@80.535,52.796
NetC173_2: C173.2 R348.2 U36.5 | length 3
  L1 TOP w0.2: C173.2@71.643,53.521 R348.2@71.643,54.544 72.706,54.544 72.949,54.787 U36.5@73.5,54.787
NetC176_2: C176.2 R351.2 U37.3 | length 2.9
  L1 TOP w0.2: U37.3@78.77,60.461 80.208,60.461 80.483,60.736 R351.2@80.535,60.736 C176.2@80.535,59.741
NetC178_2: C178.2 R354.2 U37.5 | length 2.8
  L1 TOP w0.2: C178.2@71.643,60.466 R354.2@71.643,61.338 ; R354.2@71.643,61.488 71.793,61.638 73.407,61.638 U37.5@73.5,61.731
NetC409_1: C409.1 U35.24 | length 2.1
  L1 TOP w0.2: U35.24@77.794,78.066 78.073,78.066 79.088,79.081 79.265,79.081 C409.1@79.435,79.25
NetC410_1: C410.1 U35.22 | length 3.1
  L1 TOP w0.2: U35.22@77.794,77.066 78.679,77.066 79.115,77.503 79.804,77.503 80.41,78.108 C410.1@80.435,78.108
NetC410_2: C410.2 U35.23 | length 1.9
  L1 TOP w0.2: U35.23@77.794,77.566 78.5,77.566 78.873,77.939 79.265,77.939 C410.2@79.435,78.108
NetC411_2: C411.2 U35.20 | length 1.7
  L1 TOP w0.2: U35.20@77.794,76.066 79.141,76.066 79.382,75.825 C411.2@79.435,75.825
NetD3_1: D3.1 R35.1 | length 1.7
  L1 TOP w0.3: R35.1@67.36,44.69 67.379,44.709 67.379,45.44 67.995,46.056 D3.1@67.995,46.14
NetD4_2: D4.2 L1.1 U18.7 U18.8
NetD6_2: D6.2 L2.1 U19.7 U19.8
NetD10_1: D10.1 R5.2 | length 1.7
  L1 TOP w0.3: R5.2@26.535,8.638 26.551,8.622 26.551,6.999 D10.1@26.567,6.983
NetD11_1: D11.1 R13.2 | length 1.6
  L1 TOP w0.4: R13.2@32.483,8.52 32.502,8.501 32.502,6.994 D11.1@32.52,6.975
NetD12_1: D12.1 R256.2 | length 1.6
  L1 TOP w0.3: R256.2@38.431,8.52 38.452,8.499 38.452,6.996 D12.1@38.473,6.975
NetD13_1: D13.1 R257.2 | length 1.6
  L1 TOP w0.3: R257.2@34.466,8.52 34.485,8.501 34.485,6.994 D13.1@34.505,6.975
NetD14_1: D14.1 R258.2 | length 1.6
  L1 TOP w0.3: R258.2@36.448,8.52 36.469,8.5 36.469,6.995 D14.1@36.489,6.975
NetD15_1: D15.1 R263.2 | length 1.6
  L1 TOP w0.3: R263.2@30.501,8.52 30.518,8.502 30.518,6.993 D15.1@30.536,6.975
NetD16_1: D16.1 R271.2 | length 1.7
  L1 TOP w0.4: R271.2@28.518,8.52 28.535,8.503 28.535,6.882 D16.1@28.552,6.865
NetH1_21: H1.21 R233.2 | length 2.7
  L1 TOP w0.2: H1.21@11.19,39.28 11.237,39.233 13.758,39.233 R233.2@13.805,39.186
NetH1_22: H1.22 R311.2 | length 5.6
  L1 TOP w0.2: H1.22@8.65,39.28 9.688,40.318 13.667,40.318 R311.2@13.805,40.456
NetH1_23: H1.23 R234.2 | length 2.8
  L1 TOP w0.2: H1.23@11.19,41.82 13.383,41.82 13.753,41.45 R234.2@13.805,41.45
NetH1_24: H1.24 R307.1 | length 5.8
  L1 TOP w0.2: H1.24@8.65,41.82 9.83,43 13.336,43 13.753,42.583 R307.1@13.805,42.583
NetH1_25: H1.25 R235.2 | length 2.9
  L1 TOP w0.2: H1.25@11.19,44.36 11.237,44.313 13.16,44.313 13.78,44.933 R235.2@13.805,44.933
NetH1_26: H1.26 R312.1 | length 6
  L1 TOP w0.2: H1.26@8.65,44.36 10.001,45.711 12.311,45.711 12.97,46.37 R312.1@13.805,46.37
NetH1_27: H1.27 R236.2 | length 3
  L1 TOP w0.2: H1.27@11.19,46.9 12.096,47.806 R236.2@13.805,47.806
NetH1_39: H1.39 R241.2 | length 2.8
  L1 TOP w0.2: H1.39@11.19,62.14 13.284,62.14 13.78,61.644 R241.2@13.805,61.644
NetH1_41: H1.41 R242.2 | length 3.3
  L1 TOP w0.254: H1.41@11.19,64.68 12.737,63.133 R242.2@13.805,63.133
NetH1_43: H1.43 R243.2 | length 2.8
  L1 TOP w0.2: H1.43@11.19,67.22 13.379,67.22 13.742,67.583 R243.2@13.805,67.583
NetH1_44: H1.44 R244.1 | length 5.8
  L1 TOP w0.2: H1.44@8.65,67.22 8.65,66.94 9.492,66.098 R244.1@13.805,66.098
NetH1_45: H1.45 R245.2 | length 3.6
  L1 TOP w0.2: H1.45@11.19,69.76 13.29,71.86 13.628,71.86 R245.2@13.805,72.038
NetH1_46: H1.46 R246.1 | length 6.5
  L1 TOP w0.2: H1.46@8.65,69.76 9.83,68.58 11.808,68.58 13.78,70.552 R246.1@13.805,70.552
NetH1_47: H1.47 R304.2 | length 3.1
  L1 TOP w0.2: H1.47@11.19,72.3 12.412,73.522 R304.2@13.805,73.522
NetH1_49: H1.49 R305.2 | length 2.7
  L1 TOP w0.2: H1.49@11.19,74.84 11.273,74.923 13.722,74.923 R305.2@13.805,75.006
NetJ1_2: J1.2 R25.1 | length 2.3
  L6 BOT w0.2: J1.2@11.374,83.81 11.525,83.659 R25.1@11.525,81.605
NetJ1_3: J1.3 R26.1 | length 2.2
  L6 BOT w0.2: R26.1@12.618,81.605 12.618,83.804 J1.3@12.624,83.81
NetJ4_2: J4.2 R128.2 U9.6 | length 18.1
  L1 TOP w0.2: J4.2@62.4,82.85 62.4,83.6 62.025,83.975 56.892,83.975 56.679,83.762 56.679,81.753 58.08,80.352 58.887,80.352 60.814,78.425 U9.6@62.495,78.425 63.606,78.425 63.875,78.694 64.444,78.694 R128.2@64.5,78.75
NetJ4_5: J4.5 R129.2 U9.7 | length 9
  L1 TOP w0.2: J4.5@58.65,82.85 58.65,80.851 58.767,80.734 58.973,80.734 60.603,79.104 62.466,79.104 U9.7@62.495,79.075 63.525,79.075 64.475,80.025 R129.2@64.5,80.025
NetJ5_2: J5.2 R131.2 U10.6 | length 18.8
  L6 BOT w0.2: R131.2@56.4,78.75 57.528,78.75 57.853,78.425 59.799,78.425 61.774,80.4 64.047,80.4 64.461,80.814 64.461,83.779 64.14,84.1 59.6,84.1 58.65,83.15 J5.2@58.65,82.85
NetJ5_5: J5.5 R132.2 U10.7 | length 8.8
  L6 BOT w0.2: R132.2@56.4,80.025 56.408,80.017 56.984,80.017 57.841,79.16 57.841,79.084 57.85,79.075 59.989,79.075 62.363,81.449 62.363,82.813 J5.5@62.4,82.85
NetJ15_2: J15.2 R284.2 U29.7 | length 19.6
  L6 BOT w0.2: U29.7@78.333,69.272 78.858,69.272 79.4,68.73 79.4,66.615 80.518,65.497 R284.2@80.543,65.497 80.568,65.497 81.172,66.1 82.97,66.1 84.964,68.094 84.964,69.716 87.25,72.002 87.25,74.45 86.778,74.922 J15.2@85.7,74.922
NetJ15_3: J15.3 R283.2 U29.6 | length 14.9
  L6 BOT w0.2: U29.6@78.333,69.922 78.858,69.922 79.9,68.88 79.9,67.435 80.518,66.817 R283.2@80.543,66.817 80.568,66.817 81.152,67.4 83.375,67.4 84.341,68.366 84.341,72.713 85.3,73.672 J15.3@85.7,73.672
NetJ17_2: J17.2 R295.2 U30.7 | length 10.9
  L1 TOP w0.2: U30.7@78.529,67.434 79.054,67.434 79.503,67.883 79.503,69.761 80.518,70.777 R295.2@80.543,70.777 80.568,70.777 81.492,71.7 82.878,71.7 84.717,73.539 85.568,73.539 J17.2@85.7,73.672
NetJ17_3: J17.3 R294.2 U30.6 | length 15.5
  L1 TOP w0.2: U30.6@78.529,66.784 79.054,66.784 79.9,67.63 79.9,68.813 R294.2@80.543,69.457 80.568,69.457 81.257,70.145 85.626,70.145 87.25,71.769 87.25,73.75 86.4,74.6 86.4,74.622 86.1,74.922 J17.3@85.7,74.922
NetJP3_1: JP3.1 R124.2 | length 1.6
  L6 BOT w0.4: JP3.1@31.228,30.188 R124.2@31.228,31.819
NetJP3_2: JP3.2 R125.2 U8.3 | length 3.5
  L6 BOT w0.4: JP3.2@31.228,28.651 R125.2@31.228,27.213 32.808,27.213 32.903,27.308 U8.3@32.903,27.606
NetJP4_2: JP4.2 U11.15 | length 13.2
  L1 TOP w0.3: U11.15@40.56,65.2 45.16,69.8 51.9,69.8
NetQ1_1: Q1.1 R336.2 R338.2 | length 7.3
  L6 BOT w0.4: Q1.1@71.326,56.141 74.091,56.141 74.6,56.65 75.947,56.65 76.169,56.429 R336.2@76.169,55.841 R338.2@77.7,55.841
NetQ2_1: Q2.1 R337.2 R339.2 | length 7.3
  L6 BOT w0.4: Q2.1@71.326,48.307 74.091,48.307 74.6,48.817 75.924,48.817 76.158,48.582 76.158,48.018 R337.2@76.169,48.007 76.344,48.007 R339.2@77.7,48.007
NetQ3_1: Q3.1 R340.2 R342.2 | length 7.2
  L6 BOT w0.4: Q3.1@71.326,44.391 71.389,44.454 74.253,44.454 74.699,44.9 75.809,44.9 76.044,44.666 76.044,44.191 76.144,44.091 R340.2@76.169,44.091 R342.2@77.7,44.091
NetQ4_1: Q4.1 R341.2 R343.2 | length 7.3
  L6 BOT w0.4: Q4.1@71.326,52.224 74.091,52.224 74.6,52.733 75.924,52.733 76.158,52.499 76.158,51.935 R341.2@76.169,51.924 R343.2@77.7,51.924
NetR2_1: R2.1 R7.2 U1.2 | length 2.9
  L1 TOP w0.25: R2.1@14.805,8.258 R7.2@14.805,9.263 15.47,9.263 15.823,9.616 U1.2@16.565,9.616
NetR3_1: R3.1 U1.3 | length 6.3
  L1 TOP w0.25: R3.1@13.805,5.465 13.78,5.465 13.23,6.015 13.23,7.074 13.857,7.701 15.138,7.701 15.673,8.236 15.673,8.632 16.208,9.167 U1.3@16.562,9.167
NetR4_1: R4.1 U1.4 | length 4.2
  L1 TOP w0.25: R4.1@13.805,6.643 13.851,6.689 13.851,7.164 14.012,7.326 15.923,7.326 16.762,8.164 U1.4@16.762,8.516
NetR9_1: R9.1 R15.2 U2.2 | length 2.8
  L1 TOP w0.25: R15.2@14.805,34.317 R9.1@14.805,35.317 14.856,35.368 U2.2@16.565,35.368
NetR9_2: R9.2 R10.1 U2.1 | length 3.4
  L1 TOP w0.25: R9.2@13.805,35.317 R10.1@14.805,36.317 14.83,36.317 15.303,35.844 U2.1@16.565,35.844
NetR11_1: R11.1 U2.3 | length 7.3
  L1 TOP w0.25: R11.1@13.805,31.196 13.2,31.196 13.054,31.343 13.054,33.104 13.559,33.609 15.414,33.609 15.561,33.756 15.561,34.514 15.965,34.919 U2.3@16.562,34.919
NetR12_1: R12.1 U2.4 | length 4.2
  L1 TOP w0.2: R12.1@13.805,32.471 13.805,33.077 13.922,33.194 15.644,33.194 16.387,33.937 16.387,34.394 16.437,34.444 U2.4@16.562,34.444
NetR18_2: R18.2 U3.5 | length 3
  L6 BOT w0.2: R18.2@14.533,41.758 14.598,41.693 17.387,41.693 U3.5@17.452,41.628
NetR20_2: R20.2 U3.8 | length 3.2
  L6 BOT w0.2: R20.2@14.533,45.133 14.702,44.963 15.066,44.963 15.385,45.283 17.297,45.283 U3.8@17.452,45.438
NetR61_2: R61.2 R250.2 U25.1 | length 14.4
  L1 TOP w0.2: R61.2@28.27,34.67 28.77,34.17 v1(28.77,33.914) ; U25.1@29.133,24.533 29.133,24.097 v1(29.47,23.76) 29.446,23.736 29.446,23.16 30.433,22.173 R250.2@30.433,22.148
  L6 BOT w0.2: v1(28.77,33.914) 28.77,28.909 28.737,28.876 28.737,24.493 v1(29.47,23.76)
NetR115_1: R115.1 U6.7 | length 4.9
  L1 TOP w0.3: R115.1@59.86,60.025 60.445,60.025 61.395,60.975 61.395,61.456 62.796,62.857 U6.7@62.796,63.382
NetR116_1: R116.1 U6.3 | length 3.8
  L1 TOP w0.3: U6.3@64.066,58.112 64.066,58.637 64.636,59.207 67.093,59.207 R116.1@67.1,59.2
NetR121_2: R121.2 U7.1 | length 4.2
  L6 BOT w0.2: U7.1@73.994,60.053 74.144,60.053 74.294,59.903 74.294,59.875 74.769,59.4 76.98,59.4 77.633,60.053 R121.2@77.658,60.053
NetR122_1: R122.1 R123.2 U8.6 | length 2.7
  L6 BOT w0.2: U8.6@34.803,30.116 34.842,30.155 34.842,31.78 R122.1@34.881,31.819 R123.2@35.8,31.819
NetR140_2: R140.2 U13.2 | length 1.7
  L1 TOP w0.2: R140.2@61.555,52.16 61.612,52.103 62.155,52.103 62.559,51.7 U13.2@63.1,51.7
NetR141_2: R141.2 R144.1 U13.5 | length 2.4
  L1 TOP w0.25: U13.5@65.6,53.3 65.675,53.375 65.675,54.315 R144.1@65.79,54.43 65.815,54.405 66.795,54.405 R141.2@66.9,54.3
NetR142_1: R142.1 U13.3 | length 2
  L1 TOP w0.25: R142.1@61.555,53.38 61.555,53.369 61.729,53.195 61.74,53.195 62.435,52.5 U13.3@63.2,52.5
NetR143_2: R143.2 U13.4 | length 1.5
  L1 TOP w0.2: U13.4@63.2,53.3 63.7,53.8 63.7,54.5 R143.2@63.8,54.6
NetR145_2: R145.2 U14.2 | length 1.9
  L6 BOT w0.2: R145.2@46.519,42.064 46.519,42.066 46.75,42.297 U14.2@46.75,43.84
NetR146_2: R146.2 U14.3 | length 2.1
  L6 BOT w0.2: R146.2@45.419,42.064 45.444,42.064 46.25,42.87 U14.3@46.25,43.84
NetR147_2: R147.2 U14.12 | length 2.6
  L6 BOT w0.2: U14.12@47.41,45.5 47.54,45.5 48.02,45.98 48.02,46.89 48.594,47.464 R147.2@48.619,47.464
NetR148_2: R148.2 R152.1 U14.1 | length 3
  L6 BOT w0.2: U14.1@47.25,43.84 48.305,43.84 48.581,43.564 R152.1@48.619,43.564 R148.2@48.619,42.064
NetR150_2: R150.2 U14.13 | length 1.8
  L6 BOT w0.2: U14.13@47.41,45 47.485,45.075 47.783,45.075 48.425,45.717 48.425,45.97 R150.2@48.619,46.164
NetR151_2: R151.2 U14.14 | length 1.4
  L6 BOT w0.2: U14.14@47.41,44.5 48.203,44.5 48.567,44.864 R151.2@48.619,44.864
NetR161_2: R161.2 U16.2 | length 1.6
  L1 TOP w0.2: U16.2@50.376,83.65 50.376,84.979 50.529,85.131 R161.2@50.569,85.131
NetR162_2: R162.2 U16.3 | length 1.7
  L1 TOP w0.2: R162.2@49.286,85.2 49.726,84.76 U16.3@49.726,83.65
NetR164_2: R164.2 U17.1 | length 2.2
  L1 TOP w0.2: U17.1@65.12,73.25 65.147,73.278 65.741,73.278 66.247,73.785 66.247,74.543 R164.2@66.304,74.6
NetR166_2: R166.2 U17.7 | length 2.3
  L1 TOP w0.2: R166.2@60.77,74.6 60.77,74.575 61.371,73.974 62.003,73.974 62.12,73.857 U17.7@62.12,73.25
NetR167_2: R167.2 U17.3 | length 1.5
  L1 TOP w0.2: U17.3@64.12,73.25 64.12,74.264 64.404,74.548 R167.2@64.404,74.6
NetR168_2: R168.2 U17.5 | length 1.5
  L1 TOP w0.2: R168.2@62.704,74.6 62.704,74.548 63.12,74.132 U17.5@63.12,73.25
NetR169_2: R169.2 U17.6 | length 1.8
  L1 TOP w0.2: R169.2@61.737,74.6 61.931,74.406 62.043,74.406 62.593,73.855 62.593,73.277 U17.6@62.62,73.25
NetR170_2: R170.2 U17.21 | length 1.8
  L1 TOP w0.2: U17.21@63.62,68.45 63.62,67.695 63.998,67.317 63.998,66.831 R170.2@64.02,66.809
NetR171_2: R171.2 U17.2 | length 1.7
  L1 TOP w0.2: U17.2@64.62,73.25 64.62,73.866 R171.2@65.354,74.6
NetR172_2: R172.2 U17.18 | length 2
  L1 TOP w0.2: R172.2@61.237,66.809 61.237,66.834 62.12,67.717 U17.18@62.12,68.45
NetR249_2: R249.2 U25.16 | length 2
  L1 TOP w0.2: U25.16@28.108,23.508 28.108,22.909 28.753,22.264 29.084,22.264 R249.2@29.199,22.148
NetR251_1: R251.1 U25.6 | length 1.6
  L1 TOP w0.2: U25.6@27.458,27.508 27.458,28.336 27.76,28.638 R251.1@28.085,28.638
NetR260_1: R260.1 R265.2 U26.2 | length 2.5
  L1 TOP w0.25: R260.1@14.805,25.951 R265.2@14.805,26.951 ; R265.2@15.063,27.17 U26.2@16.565,27.17
NetR261_1: R261.1 U26.3 | length 6.5
  L1 TOP w0.25: R261.1@13.766,23.013 13.04,23.739 13.04,24.541 13.796,25.297 15.042,25.297 15.762,26.017 15.762,26.396 16.087,26.721 U26.3@16.562,26.721
NetR262_1: R262.1 U26.4 | length 4.1
  L1 TOP w0.25: R262.1@13.805,24.188 13.805,24.776 13.951,24.922 15.197,24.922 16.346,26.071 U26.4@16.762,26.071
NetR268_1: R268.1 R273.2 U27.2 | length 2.9
  L1 TOP w0.25: R268.1@14.805,17.172 R273.2@14.805,18.172 14.844,18.172 15.063,18.392 U27.2@16.565,18.392
NetR269_1: R269.1 U27.3 | length 6.6
  L1 TOP w0.25: R269.1@13.805,14.234 13.766,14.234 13.04,14.96 13.04,15.634 13.942,16.536 15.06,16.536 15.399,16.875 15.399,17.48 15.862,17.942 U27.3@16.562,17.942
NetR270_1: R270.1 U27.4 | length 4
  L1 TOP w0.25: R270.1@13.805,15.509 13.83,15.509 14.482,16.161 16.231,16.161 16.762,16.692 U27.4@16.762,17.292
NetR277_2: R277.2 R278.1 U32.5 | length 2.8
  L1 TOP w0.2: U32.5@52.123,66.082 52.123,66.788 R278.1@52.834,67.5 R277.2@53.909,67.5
NetR279_1: R279.1 R322.2 U33.4 | length 3.5
  L1 TOP w0.4: R279.1@71.532,6.99 R322.2@71.532,5.912 71.562,5.882 72.088,5.882 72.96,5.01 73.519,5.01 U33.4@73.586,4.943
NetR281_2: R281.2 R286.2 R302.2 U29.3 | length 5.3
  L6 BOT w0.2: R281.2@71.643,68.868 R302.2@71.643,71.4 ; R281.2@71.826,69.096 71.851,69.096 72.677,69.922 U29.3@74.233,69.922
NetR282_2: R282.2 R285.2 R289.2 U29.2 | length 5.8
  L6 BOT w0.2: R285.2@71.643,65.069 R289.2@71.643,66.335 R282.2@71.643,67.601 71.674,67.601 73.344,69.272 U29.2@74.233,69.272
NetR287_2: R287.2 R288.1 R315.2 U29.5 | length 4.9
  L6 BOT w0.2: U29.5@78.333,70.572 80.286,70.572 80.491,70.777 R315.2@80.543,70.777 R288.1@80.543,69.457 R287.2@80.543,68.137
NetR292_2: R292.2 R297.2 R317.2 U30.3 | length 6.4
  L1 TOP w0.2: R292.2@71.643,68.867 71.729,68.781 71.729,68.392 73.312,66.809 74.405,66.809 U30.3@74.429,66.784 ; R292.2@71.77,68.867 71.77,70.134 R317.2@71.77,71.4
NetR293_2: R293.2 R296.2 R316.2 U30.2 | length 9.6
  L1 TOP w0.2: R296.2@71.77,65.068 71.77,66.335 71.77,67.601 71.795,67.601 72.5,66.896 72.5,65.923 72.854,65.569 74.779,65.569 75.186,65.975 75.186,67.259 75.011,67.434 U30.2@74.429,67.434
NetR298_2: R298.2 R299.1 R318.2 U30.5 | length 5.1
  L1 TOP w0.2: U30.5@78.529,66.134 79.014,66.134 79.083,66.065 79.083,66.056 79.643,65.497 R299.1@80.543,65.497 R318.2@80.543,67.082 ; R318.2@80.386,66.949 80.518,67.082 R318.2@80.543,67.082 ; R298.2@80.543,68.137 R318.2@80.543,67.082
NetR319_2: R319.2 U4.8 | length 4.5
  L6 BOT w0.2: R319.2@14.501,55.619 14.501,55.594 17.073,53.022 17.073,52.252 U4.8@17.131,52.194
NetR320_2: R320.2 U4.10 | length 5.8
  L6 BOT w0.2: U4.10@22.871,51.544 23.99,51.544 24.21,51.764 24.21,54.749 24.86,55.398 R320.2@25.34,55.398
NetR321_2: R321.2 U12.2 | length 1.8
  L1 TOP w0.25: R321.2@44.501,85.2 44.501,85.189 44.674,85.015 44.686,85.015 45.055,84.646 U12.2@45.055,83.65
NetR327_1: R327.1 U28.7 | length 1.9
  L6 BOT w0.3: R327.1@43.1,37.905 43.1,37.93 43.705,38.535 U28.7@44.756,38.535
NetR328_1: R328.1 U28.3 | length 4.4
  L6 BOT w0.2: R328.1@49.669,34.221 49.463,34.427 48.925,34.966 48.925,36.872 49.291,37.238 50.177,37.238 U28.3@50.204,37.265
NetR331_2: R331.2 U12.3 | length 2.1
  L1 TOP w0.25: R331.2@43.305,85.2 43.478,85.026 43.699,85.026 44.386,84.339 44.386,83.669 U12.3@44.405,83.65
NetR344_1: R344.1 U36.1 U36.2 | length 3.1
  L1 TOP w0.2: U36.2@78.77,52.247 U36.1@78.77,50.977 78.855,50.891 R344.1@80.535,50.891
NetR347_1: R347.1 U36.6 U36.7 | length 3.5
  L1 TOP w0.2: R347.1@71.643,51.476 72.268,51.476 72.809,52.016 72.809,52.055 73,52.247 U36.7@73.5,52.247 U36.6@73.5,53.517
NetR350_1: R350.1 U37.1 U37.2 | length 3.1
  L1 TOP w0.2: U37.2@78.77,59.191 U37.1@78.77,57.921 78.855,57.836 80.449,57.836 R350.1@80.535,57.75
NetR353_1: R353.1 U37.6 U37.7 | length 3.4
  L1 TOP w0.2: R353.1@71.643,58.42 72.229,58.42 73,59.191 U37.7@73.5,59.191 U37.6@73.5,60.461
NetR409_2: R409.2 U35.1 | length 2
  L1 TOP w0.2: R409.2@71.643,79.25 72.152,79.25 72.993,78.409 U35.1@72.993,78.066
NetR411_2: R411.2 U35.7 | length 2.1
  L1 TOP w0.2: R411.2@71.643,73.716 71.668,73.716 72.233,74.28 72.233,74.658 72.615,75.039 72.966,75.039 U35.7@72.993,75.066
NetR412_2: R412.2 U35.3 | length 1.5
  L1 TOP w0.2: R412.2@71.643,77.35 71.744,77.249 72.104,77.249 72.287,77.066 U35.3@72.993,77.066
NetR413_2: R413.2 U35.5 | length 1.5
  L1 TOP w0.2: R413.2@71.643,75.65 71.696,75.65 72.112,76.066 U35.5@72.993,76.066
NetR414_2: R414.2 U35.6 | length 1.7
  L1 TOP w0.2: R414.2@71.643,74.683 71.668,74.683 72.525,75.539 72.966,75.539 U35.6@72.993,75.566
NetR415_2: R415.2 U35.21 | length 1.8
  L1 TOP w0.2: U35.21@77.794,76.566 78.982,76.566 79.382,76.966 R415.2@79.435,76.966
NetR416_2: R416.2 U35.2 | length 1.7
  L1 TOP w0.2: R416.2@71.643,78.3 72.377,77.566 U35.2@72.993,77.566
NetR417_2: R417.2 U35.18 | length 2
  L1 TOP w0.2: U35.18@77.794,75.066 78.526,75.066 79.41,74.183 R417.2@79.435,74.183
NTC1-: J19.2 R348.1 R349.2 | length 14.2
  L1 TOP w0.2: R348.1@70.643,54.544 70.668,54.544 71.449,55.325 71.449,55.371 71.548,55.47 R349.2@71.643,55.47 ; R349.2@71.643,55.567 71.652,55.567 72.251,56.166 84.014,56.166 J19.2@84.13,56.05
NTC2-: J19.4 R345.1 R346.2 | length 9.3
  L1 TOP w0.2: R345.1@81.535,53.792 R346.2@81.535,54.787 81.56,54.787 82.073,55.3 84.9,55.3 85.137,55.537 85.137,58.825 84.912,59.05 J19.4@84.13,59.05
NTC3-: J19.6 R351.1 R352.2 | length 3.7
  L1 TOP w0.2: R351.1@81.535,60.736 R352.2@81.535,61.731 82.499,61.731 82.818,62.05 J19.6@84.13,62.05
NTC4-: J19.8 R354.1 R355.2 | length 15
  L1 TOP w0.2: R354.1@70.643,61.488 70.668,61.488 71.449,62.269 71.449,62.317 R355.2@71.643,62.511 71.668,62.511 72.655,63.498 82.378,63.498 83.93,65.05 J19.8@84.13,65.05
PA00: R27.1 U5.102 | length 7
  L1 TOP w0.2: U5.102@53.172,47.064 55.264,47.064 56.145,47.945 56.145,49.294 57.783,50.932 R27.1@57.808,50.932
PA01: R29.1 U5.99 | length 5.7
  L1 TOP w0.2: U5.99@53.172,45.564 55.348,45.564 R29.1@57.808,48.024
PA02: R31.2 U5.93 | length 5.7
  L1 TOP w0.2: U5.93@53.172,42.564 55.231,42.564 57.783,45.116 R31.2@57.808,45.116
PA03: R33.1 U5.91 | length 5.3
  L1 TOP w0.2: U5.91@53.172,41.564 56.169,41.564 57.783,43.178 R33.1@57.808,43.178
PA04: R36.1 U5.77 | length 5.7
  L1 TOP w0.2: U5.77@53.172,34.564 54.646,34.564 57.194,32.017 R36.1@57.808,32.017
PA05: U5.73
PA06: U5.114
PA07: U5.35
PA08: U5.36
PA09: R46.1 U5.75 | length 6
  L1 TOP w0.2: U5.75@53.172,33.564 53.191,33.545 54.316,33.545 57.714,30.148 R46.1@57.739,30.148
PA10: R48.1 U5.66 | length 4.1
  L1 TOP w0.2: U5.66@48.322,30.764 48.322,29.559 R48.1@50.39,27.49
PA11: R79.1 U5.64 | length 3.7
  L1 TOP w0.2: U5.64@47.322,30.764 47.322,29.509 48.406,28.424 48.406,27.514 R79.1@48.43,27.49
PA12: R303.1 U5.68 | length 5.4
  L1 TOP w0.2: U5.68@49.322,30.764 49.341,30.745 49.341,29.626 50.267,28.7 51.704,28.7 52.34,28.064 R303.1@52.34,27.49
PA13: U5.42
PA14: U5.51
PA15: U5.49
PA16: U5.45
PA17: U5.25
PA18: U5.24
PA19: R58.1 U5.23 | length 3.3
  L1 TOP w0.2: R58.1@29.27,37.654 29.831,37.654 31.222,39.045 31.952,39.045 U5.23@31.972,39.064
PA20: R60.1 U5.22 | length 3.1
  L1 TOP w0.2: R60.1@29.27,38.644 29.901,38.644 30.822,39.564 U5.22@31.972,39.564
PA21: R61.1 U5.32 | length 2.7
  L1 TOP w0.2: R61.1@29.27,34.67 29.376,34.564 29.435,34.564 U5.32@31.972,34.564
PA22: U5.37
PA23: U5.46
PA24: R42.1 U5.56 | length 3.6
  L1 TOP w0.2: R42.1@42.46,27.49 42.46,27.515 43.322,28.377 U5.56@43.322,30.764
PA25: R44.1 U5.59 | length 3.4
  L1 TOP w0.2: R44.1@44.472,27.49 44.472,28.954 44.822,29.303 U5.59@44.822,30.764
PA26: R69.1 U5.62 | length 3.3
  L1 TOP w0.2: U5.62@46.322,30.764 46.322,27.608 R69.1@46.439,27.49
PA27: R71.1 U5.70 | length 6.2
  L1 TOP w0.2: U5.70@50.322,30.764 50.341,30.745 50.341,30.015 50.991,29.364 53.155,29.364 54.307,28.212 R71.1@54.307,27.49
PA28: R73.1 U5.112 | length 3.6
  L1 TOP w0.2: U5.112@49.822,51.864 49.841,51.884 49.841,55.326 R73.1@49.935,55.42
PA29: U5.129
PA30: R313.1 U5.116 | length 4.1
  L1 TOP w0.2: U5.116@47.822,51.864 47.822,53.441 48.93,54.55 48.93,55.314 R313.1@48.824,55.42
PA31: R325.1 U5.118 | length 3.6
  L1 TOP w0.2: U5.118@46.822,51.864 46.822,55.351 R325.1@46.89,55.42
PB00: U5.21
PB01: R334.2 U5.20 | length 3
  L1 TOP w0.2: R334.2@29.27,39.733 29.795,39.733 30.626,40.564 U5.20@31.972,40.564
PB02: R326.2 U5.26 | length 3.1
  L1 TOP w0.2: R326.2@29.27,36.664 29.922,36.664 30.822,37.564 U5.26@31.972,37.564
PB03: U5.31
PB04: R92.2 U5.105 | length 6.9
  L1 TOP w0.2: U5.105@53.172,48.564 54.297,48.564 55.348,49.615 55.348,50.435 57.783,52.87 R92.2@57.808,52.87
PB05: R94.2 R97.2 U5.109 | length 4.7
  L1 TOP w0.2: U5.109@51.322,51.864 51.322,52.564 51.752,52.995 51.752,55.42 R94.2@52.691,55.42
PB06: R96.2 U5.79 | length 5.3
  L1 TOP w0.2: U5.79@53.172,35.564 55.286,35.564 56.864,33.986 57.777,33.986 R96.2@57.808,33.955
PB07: R99.2 U5.89 | length 4.9
  L1 TOP w0.2: U5.89@53.172,40.564 53.191,40.584 53.958,40.584 53.97,40.595 57.139,40.595 57.783,41.24 R99.2@57.808,41.24
PB12: R14.2 U5.87 | length 4.7
  L1 TOP w0.2: U5.87@53.172,39.564 57.493,39.564 57.756,39.301 R14.2@57.808,39.301
PB13: R104.2 U5.144 | length 4.6
  L1 TOP w0.2: R104.2@29.27,51.92 33.775,51.92 33.822,51.874 U5.144@33.822,51.864
PC00: U5.11
PC01: R82.1 U5.38 | length 6.4
  L1 TOP w0.2: R82.1@29.26,31.44 32.753,31.44 33.283,31.97 34.146,31.97 34.322,31.794 U5.38@34.322,30.764
PC02: U5.39
PC03: R86.1 U5.40 | length 3.4
  L1 TOP w0.2: R86.1@34.948,27.49 34.948,28.77 35.322,29.144 U5.40@35.322,30.764
PC04: R87.1 U5.41 | length 3.3
  L1 TOP w0.2: U5.41@35.822,30.764 35.822,27.597 R87.1@35.928,27.49
PC05: U5.58
PC06: U5.54
PC07: R47.1 U5.48 | length 3.6
  L1 TOP w0.2: R47.1@38.568,27.49 38.621,27.543 38.621,28.441 39.322,29.141 U5.48@39.322,30.764
PC08: R49.1 U5.82 | length 5.5
  L1 TOP w0.2: U5.82@53.172,37.064 54.691,37.064 56.831,34.924 R49.1@57.808,34.924
PC09: R88.1 U5.86 | length 5
  L1 TOP w0.2: U5.86@53.172,39.064 56.9,39.064 57.783,38.182 R88.1@57.808,38.182
PC10: R90.1 U5.90 | length 5.1
  L1 TOP w0.2: U5.90@53.172,41.064 56.639,41.064 57.783,42.209 R90.1@57.808,42.209
PC11: U5.94
PC12: R93.1 U5.17 | length 3.3
  L1 TOP w0.2: R93.1@29.27,40.67 29.386,40.786 29.716,40.786 30.975,42.045 31.952,42.045 U5.17@31.972,42.064
PC13: U5.19
PC14: R98.1 U5.97 | length 5.3
  L1 TOP w0.2: U5.97@53.172,44.564 56.262,44.564 57.783,46.086 R98.1@57.808,46.086
PC15: U5.18
PC16: R101.1 U5.100 | length 6.1
  L1 TOP w0.2: U5.100@53.172,46.064 55.274,46.064 56.795,47.585 56.795,48.005 57.783,48.993 R101.1@57.808,48.993
PC17: R102.1 U5.103 | length 7.5
  L1 TOP w0.2: U5.103@53.172,47.564 55.234,47.564 55.82,48.15 55.82,49.938 57.783,51.901 R102.1@57.808,51.901
PC18: R103.1 U5.111 | length 3.9
  L1 TOP w0.2: U5.111@50.322,51.864 50.322,53.999 50.757,54.435 50.757,55.335 R103.1@50.757,55.42 ; R103.1@50.814,55.335 R103.1@50.958,55.335
PC19: R105.1 U5.117 | length 3.8
  L1 TOP w0.2: U5.117@47.322,51.864 47.322,53.446 47.857,53.982 R105.1@47.857,55.42
PC20: U5.120
PC21: R106.1 U5.122 | length 4.1
  L1 TOP w0.2: U5.122@44.822,51.864 44.822,53.022 46.022,54.222 R106.1@46.022,55.42
PC22: R30.1 U5.124 | length 4.1
  L1 TOP w0.2: U5.124@43.822,51.864 43.822,53.439 45.022,54.639 R30.1@45.022,55.42